# Altium PCB DSP6748_F.PcbDoc (part 10 of 16)
Units mil, origin at the board's own origin, x right, y up, seen from the top; angles counter-clockwise.
Board outline 8188.98 x 4055.12 mil, 4 copper layers (Top Layer, GND, VCC, Bottom Layer); 409 components, 262 nets, 1424 pads, 350 vias.
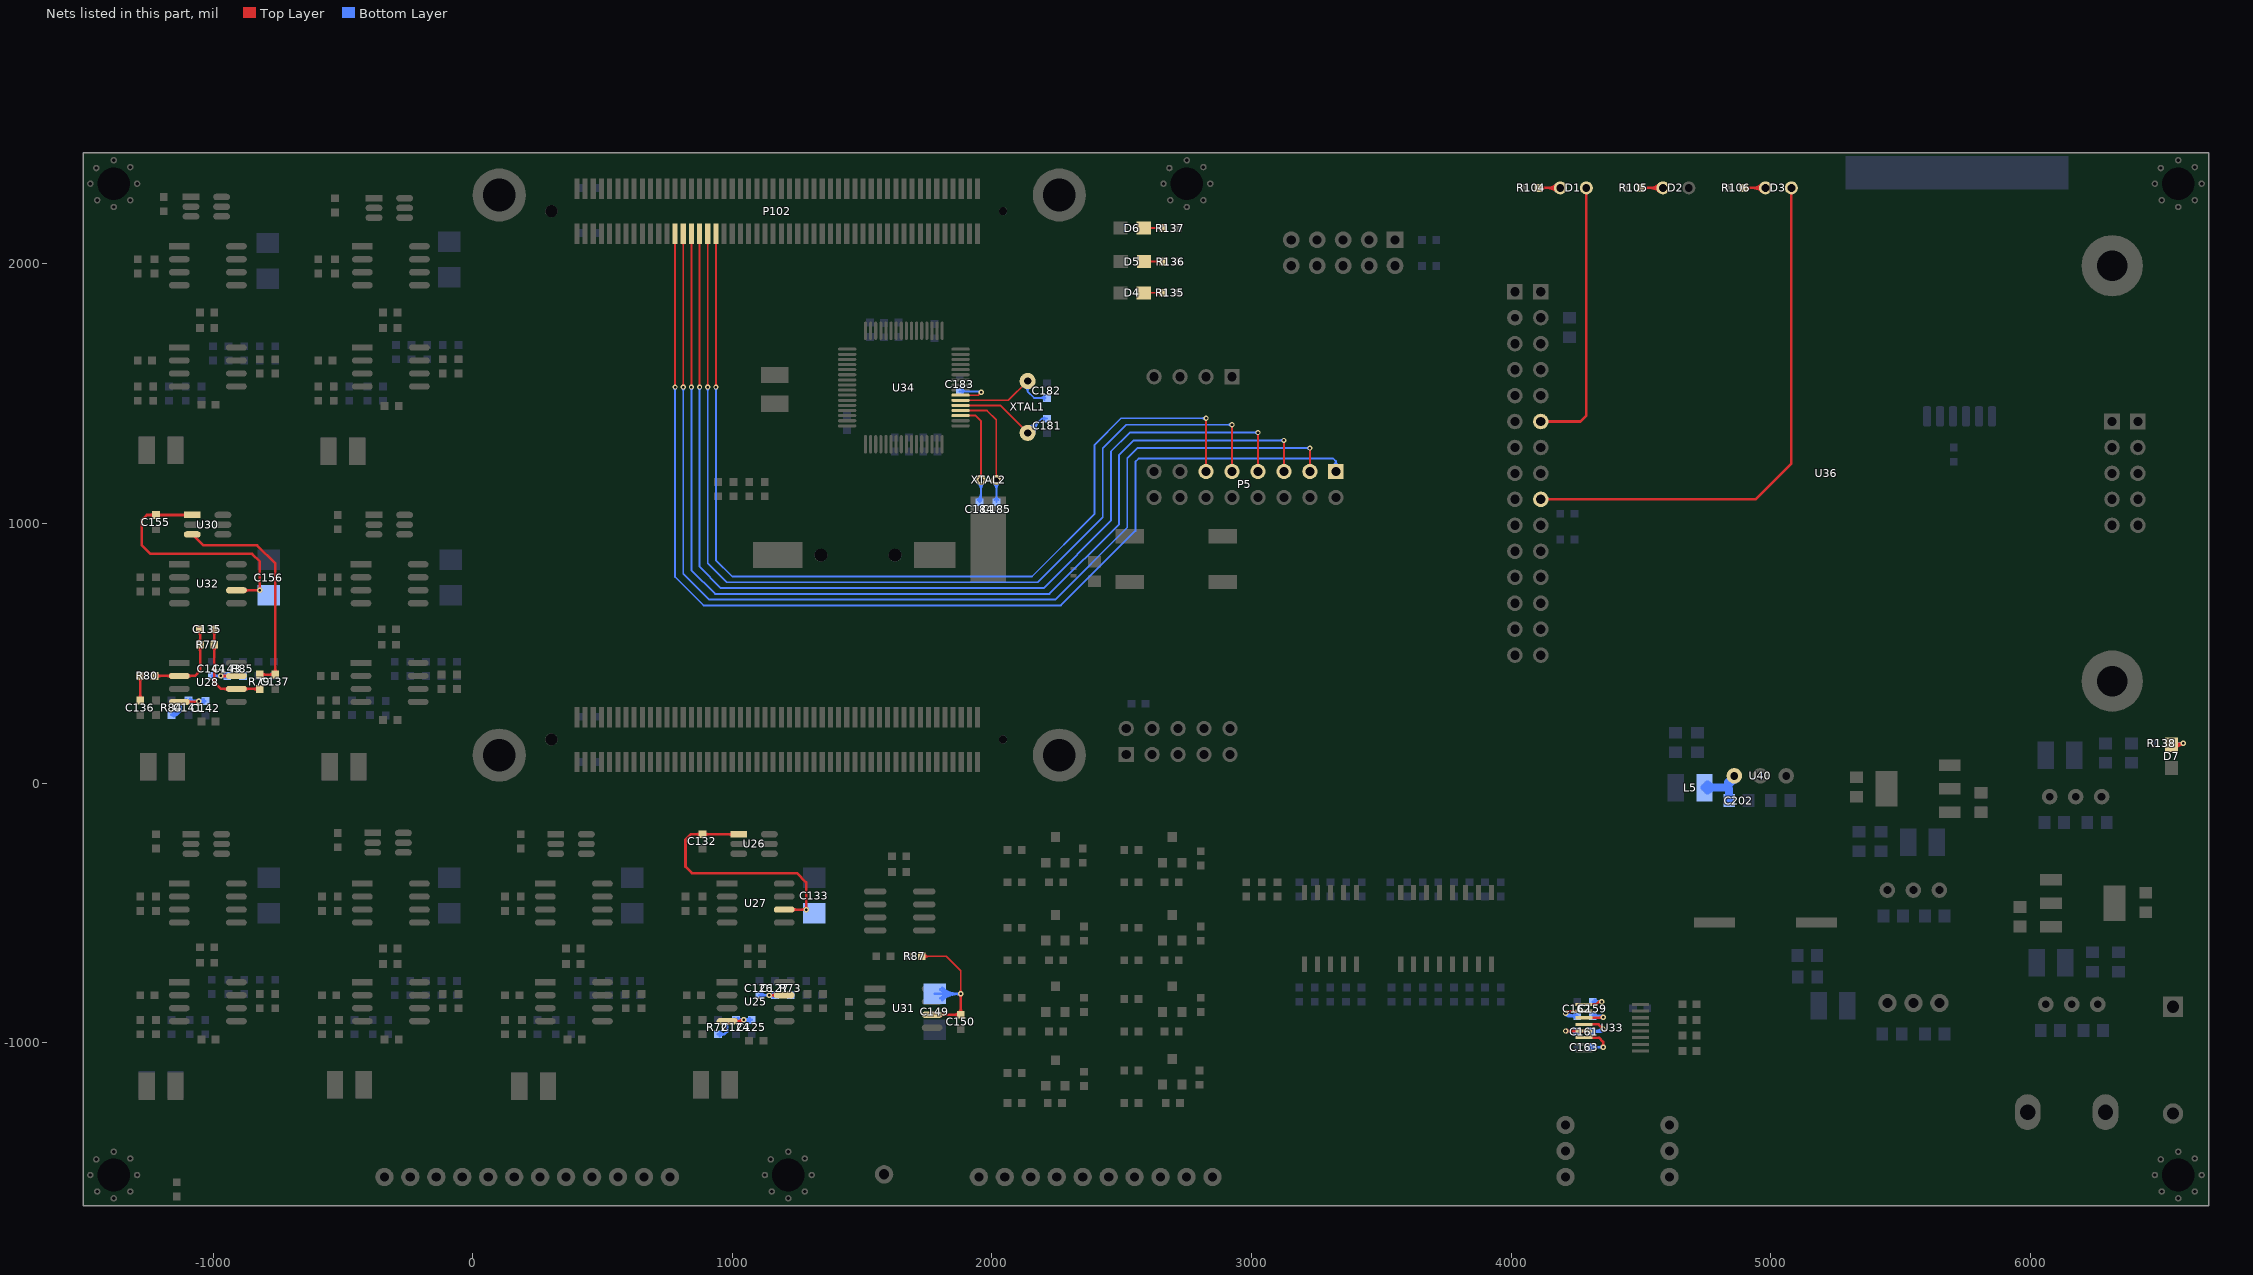
[diagram p12: the nets of this part, all layers, seen from the top]

## Via types
v1: diameter 21, hole 10, Top Layer to Bottom Layer, 244 vias
v2: diameter 20, hole 10, Top Layer to Bottom Layer, 84 vias
v3: diameter 32, hole 16, Top Layer to Bottom Layer, 11 vias
v4: diameter 24, hole 12, Top Layer to Bottom Layer, 7 vias
v5: diameter 39.37, hole 19.68, Top Layer to Bottom Layer, 3 vias
v6: diameter 30, hole 15, Top Layer to Bottom Layer, 1 vias

## Nets (pads, with @x,y where several pads share a name; then routed paths per layer and width w, separated by ;. In a path a pad name is that pad's centre, name@x,y a point inside that pad or via, vN(x,y) a via of type N, cw(c..) or ccw(c..) an arc to the next point about the centre after c; other vN are vias at no path point) (continued)
NetC124_2: C124.2 C125.2 R72.2 U25.4 | length 1117.1
  Top Layer w10: U25.4@979.81,-917.48 1039.81,-917.48 v1(1044.81,-912.48) ; U25.4@1012.76,-922.43 cw(c1024.71,-934.38) 1024.71,-917.48 ; U25.4@1012.76,-922.43 cw(c1024.71,-934.38) 1024.71,-917.48 ; U25.4@1012.76,-922.43 cw(c1024.71,-934.38) 1024.71,-917.48 ; U25.4@1012.76,-912.53 ccw(c1024.71,-900.58) 1024.71,-917.48 ; U25.4@1012.76,-912.53 ccw(c1024.71,-900.58) 1024.71,-917.48 ; U25.4@1012.76,-912.53 ccw(c1024.71,-900.58) 1024.71,-917.48 ; U25.4@1019.46,-917.48 ccw(c1019.46,-887.13) v1@1040.92,-908.59 ; U25.4@1019.46,-917.48 ccw(c1019.46,-887.13) v1@1040.92,-908.59 ; U25.4@1019.46,-917.48 ccw(c1019.46,-887.13) v1@1040.92,-908.59
  Bottom Layer w10: R72.2@944.81,-967.48 969.81,-967.48 979.81,-957.48 979.81,-924.48 991.81,-912.48 ; C125.2@1074.81,-912.48 v1(1044.81,-912.48) C124.2@1014.81,-912.48 991.81,-912.48 ; R72.2@951.88,-974.55 cw(c968.95,-991.62) 968.95,-967.48 ; R72.2@951.88,-974.55 cw(c968.95,-991.62) 968.95,-967.48 ; R72.2@951.88,-974.55 cw(c968.95,-991.62) 968.95,-967.48 ; R72.2@951.88,-960.41 ccw(c968.95,-943.34) 968.95,-967.48 ; R72.2@951.88,-960.41 ccw(c968.95,-943.34) 968.95,-967.48 ; R72.2@951.88,-960.41 ccw(c968.95,-943.34) 968.95,-967.48 ; 991.81,-912.48 cw(c991.81,-933.93) C124.2@1007.5,-919.3 ; 991.81,-912.48 ccw(c991.81,-891.03) C124.2@1007.5,-905.66 ; 991.81,-912.48 cw(c991.81,-933.93) C124.2@1007.5,-919.3 ; 991.81,-912.48 ccw(c991.81,-891.03) C124.2@1007.5,-905.66 ; 991.81,-912.48 ccw(c991.81,-891.03) C124.2@1007.5,-905.66 ; 991.81,-912.48 cw(c991.81,-933.93) C124.2@1007.5,-919.3 ; C124.2@1021.88,-919.55 cw(c1038.95,-936.62) v1@1038.95,-912.48 ; C124.2@1021.88,-919.55 cw(c1038.95,-936.62) v1@1038.95,-912.48 ; C124.2@1021.88,-919.55 cw(c1038.95,-936.62) v1@1038.95,-912.48 ; C124.2@1021.88,-905.41 ccw(c1038.95,-888.34) v1@1038.95,-912.48 ; C124.2@1021.88,-905.41 ccw(c1038.95,-888.34) v1@1038.95,-912.48 ; C124.2@1021.88,-905.41 ccw(c1038.95,-888.34) v1@1038.95,-912.48 ; C124.2@1029.42,-915.03 cw(c1033.35,-929.71) v1@1041.76,-917.06 ; C124.2@1029.42,-915.03 cw(c1033.35,-929.71) v1@1041.76,-917.06 ; C124.2@1029.42,-915.03 cw(c1033.35,-929.71) v1@1041.76,-917.06 ; C124.2@1029.42,-909.93 ccw(c1033.35,-895.25) v1@1041.76,-907.9 ; C124.2@1029.42,-909.93 ccw(c1033.35,-895.25) v1@1041.76,-907.9 ; C124.2@1029.42,-909.93 ccw(c1033.35,-895.25) v1@1041.76,-907.9 ; 1031.53,-912.48 cw(c1031.53,-925.76) v1@1040.92,-916.37 ; 1031.53,-912.48 ccw(c1031.53,-899.2) v1@1040.92,-908.59 ; 1031.53,-912.48 cw(c1031.53,-925.76) v1@1040.92,-916.37 ; 1031.53,-912.48 ccw(c1031.53,-899.2) v1@1040.92,-908.59 ; 1031.53,-912.48 ccw(c1031.53,-899.2) v1@1040.92,-908.59 ; 1031.53,-912.48 cw(c1031.53,-925.76) v1@1040.92,-916.37 ; v1@1047.86,-917.06 cw(c1056.27,-929.71) C125.2@1060.2,-915.03 ; v1@1047.86,-917.06 cw(c1056.27,-929.71) C125.2@1060.2,-915.03 ; v1@1047.86,-917.06 cw(c1056.27,-929.71) C125.2@1060.2,-915.03 ; v1@1047.86,-907.9 ccw(c1056.27,-895.25) C125.2@1060.2,-909.93 ; v1@1047.86,-907.9 ccw(c1056.27,-895.25) C125.2@1060.2,-909.93 ; v1@1047.86,-907.9 ccw(c1056.27,-895.25) C125.2@1060.2,-909.93 ; v1@1048.7,-916.37 cw(c1058.09,-925.76) 1058.09,-912.48 ; v1@1048.7,-916.37 cw(c1058.09,-925.76) 1058.09,-912.48 ; v1@1048.7,-916.37 cw(c1058.09,-925.76) 1058.09,-912.48 ; v1@1048.7,-908.59 ccw(c1058.09,-899.2) 1058.09,-912.48 ; v1@1048.7,-908.59 ccw(c1058.09,-899.2) 1058.09,-912.48 ; v1@1048.7,-908.59 ccw(c1058.09,-899.2) 1058.09,-912.48 ; v1@1050.67,-912.48 cw(c1050.67,-936.62) C125.2@1067.74,-919.55 ; v1@1050.67,-912.48 ccw(c1050.67,-888.34) C125.2@1067.74,-905.41 ; v1@1050.67,-912.48 cw(c1050.67,-936.62) C125.2@1067.74,-919.55 ; v1@1050.67,-912.48 ccw(c1050.67,-888.34) C125.2@1067.74,-905.41 ; v1@1050.67,-912.48 ccw(c1050.67,-888.34) C125.2@1067.74,-905.41 ; v1@1050.67,-912.48 cw(c1050.67,-936.62) C125.2@1067.74,-919.55
NetC126_2: C126.2 C127.2 R73.1 U25.7 | length 855.7
  Top Layer w10: v1@1144.81,-817.48 U25.7@1199.81,-817.48 ; v1@1146.7,-821.37 cw(c1156.09,-830.76) 1156.09,-817.48 ; v1@1146.7,-821.37 cw(c1156.09,-830.76) 1156.09,-817.48 ; v1@1146.7,-821.37 cw(c1156.09,-830.76) 1156.09,-817.48 ; v1@1146.7,-813.59 ccw(c1156.09,-804.2) 1156.09,-817.48 ; v1@1146.7,-813.59 ccw(c1156.09,-804.2) 1156.09,-817.48 ; v1@1146.7,-813.59 ccw(c1156.09,-804.2) 1156.09,-817.48 ; 1154.91,-817.48 cw(c1154.91,-834.38) U25.7@1166.86,-822.43 ; 1154.91,-817.48 ccw(c1154.91,-800.58) U25.7@1166.86,-812.53 ; 1154.91,-817.48 cw(c1154.91,-834.38) U25.7@1166.86,-822.43 ; 1154.91,-817.48 ccw(c1154.91,-800.58) U25.7@1166.86,-812.53 ; 1154.91,-817.48 ccw(c1154.91,-800.58) U25.7@1166.86,-812.53 ; 1154.91,-817.48 cw(c1154.91,-834.38) U25.7@1166.86,-822.43
  Bottom Layer w10: C126.2@1104.81,-817.48 C127.2@1164.81,-817.48 R73.1@1224.81,-817.48 ; v1@1146.7,-821.37 cw(c1156.09,-830.76) 1156.09,-817.48 cw(c1156.09,-804.2) v1@1146.7,-813.59 ; C126.2@1111.88,-824.55 cw(c1128.95,-841.62) 1128.95,-817.48 ; C126.2@1111.88,-824.55 cw(c1128.95,-841.62) 1128.95,-817.48 ; C126.2@1111.88,-824.55 cw(c1128.95,-841.62) 1128.95,-817.48 ; C126.2@1111.88,-810.41 ccw(c1128.95,-793.34) 1128.95,-817.48 ; C126.2@1111.88,-810.41 ccw(c1128.95,-793.34) 1128.95,-817.48 ; C126.2@1111.88,-810.41 ccw(c1128.95,-793.34) 1128.95,-817.48 ; 1129.53,-817.48 cw(c1129.53,-830.76) v1@1138.92,-821.37 ; 1129.53,-817.48 ccw(c1129.53,-804.2) v1@1138.92,-813.59 ; 1129.53,-817.48 cw(c1129.53,-830.76) v1@1138.92,-821.37 ; 1129.53,-817.48 ccw(c1129.53,-804.2) v1@1138.92,-813.59 ; 1129.53,-817.48 ccw(c1129.53,-804.2) v1@1138.92,-813.59 ; 1129.53,-817.48 cw(c1129.53,-830.76) v1@1138.92,-821.37 ; v1@1140.67,-817.48 cw(c1140.67,-841.62) C127.2@1157.74,-824.55 ; v1@1140.67,-817.48 ccw(c1140.67,-793.34) C127.2@1157.74,-810.41 ; v1@1140.67,-817.48 cw(c1140.67,-841.62) C127.2@1157.74,-824.55 ; v1@1140.67,-817.48 ccw(c1140.67,-793.34) C127.2@1157.74,-810.41 ; v1@1140.67,-817.48 ccw(c1140.67,-793.34) C127.2@1157.74,-810.41 ; v1@1140.67,-817.48 cw(c1140.67,-841.62) C127.2@1157.74,-824.55 ; C127.2@1171.88,-824.55 cw(c1188.95,-841.62) 1188.95,-817.48 ; C127.2@1171.88,-824.55 cw(c1188.95,-841.62) 1188.95,-817.48 ; C127.2@1171.88,-824.55 cw(c1188.95,-841.62) 1188.95,-817.48 ; C127.2@1171.88,-810.41 ccw(c1188.95,-793.34) 1188.95,-817.48 ; C127.2@1171.88,-810.41 ccw(c1188.95,-793.34) 1188.95,-817.48 ; C127.2@1171.88,-810.41 ccw(c1188.95,-793.34) 1188.95,-817.48 ; 1200.67,-817.48 cw(c1200.67,-841.62) R73.1@1217.74,-824.55 ; 1200.67,-817.48 ccw(c1200.67,-793.34) R73.1@1217.74,-810.41 ; 1200.67,-817.48 cw(c1200.67,-841.62) R73.1@1217.74,-824.55 ; 1200.67,-817.48 ccw(c1200.67,-793.34) R73.1@1217.74,-810.41 ; 1200.67,-817.48 ccw(c1200.67,-793.34) R73.1@1217.74,-810.41 ; 1200.67,-817.48 cw(c1200.67,-841.62) R73.1@1217.74,-824.55
  other v1: 1142.81,-817.48
NetC132_2: C132.2 C133.1 U26.1 U27.6 | length 1515.8
  Top Layer w10: U26.1@1024.81,-197.48 C132.2@884.81,-197.48 839.81,-197.48 819.81,-217.48 819.81,-322.48 844.81,-347.48 1249.81,-347.48 1284.81,-382.48 v1(1284.81,-487.48) U27.6@1199.81,-487.48 ; 860.67,-197.48 cw(c860.67,-221.62) C132.2@877.74,-204.55 ; 860.67,-197.48 ccw(c860.67,-173.34) C132.2@877.74,-190.41 ; 860.67,-197.48 cw(c860.67,-221.62) C132.2@877.74,-204.55 ; 860.67,-197.48 ccw(c860.67,-173.34) C132.2@877.74,-190.41 ; 860.67,-197.48 ccw(c860.67,-173.34) C132.2@877.74,-190.41 ; 860.67,-197.48 cw(c860.67,-221.62) C132.2@877.74,-204.55 ; C132.2@891.88,-204.55 cw(c908.95,-221.62) 908.95,-197.48 ; C132.2@891.88,-204.55 cw(c908.95,-221.62) 908.95,-197.48 ; C132.2@891.88,-204.55 cw(c908.95,-221.62) 908.95,-197.48 ; C132.2@891.88,-190.41 ccw(c908.95,-173.34) 908.95,-197.48 ; C132.2@891.88,-190.41 ccw(c908.95,-173.34) 908.95,-197.48 ; C132.2@891.88,-190.41 ccw(c908.95,-173.34) 908.95,-197.48 ; 986.7,-197.48 cw(c986.7,-215.59) U26.1@999.51,-202.78 ; 986.7,-197.48 ccw(c986.7,-179.37) U26.1@999.51,-192.18 ; 986.7,-197.48 cw(c986.7,-215.59) U26.1@999.51,-202.78 ; 986.7,-197.48 ccw(c986.7,-179.37) U26.1@999.51,-192.18 ; 986.7,-197.48 ccw(c986.7,-179.37) U26.1@999.51,-192.18 ; 986.7,-197.48 cw(c986.7,-215.59) U26.1@999.51,-202.78 ; U27.6@1232.76,-492.43 cw(c1244.71,-504.38) 1244.71,-487.48 ; U27.6@1232.76,-492.43 cw(c1244.71,-504.38) 1244.71,-487.48 ; U27.6@1232.76,-492.43 cw(c1244.71,-504.38) 1244.71,-487.48 ; U27.6@1232.76,-482.53 ccw(c1244.71,-470.58) 1244.71,-487.48 ; U27.6@1232.76,-482.53 ccw(c1244.71,-470.58) 1244.71,-487.48 ; U27.6@1232.76,-482.53 ccw(c1244.71,-470.58) 1244.71,-487.48 ; 1271.53,-487.48 cw(c1271.53,-500.76) v1@1280.92,-491.37 ; 1271.53,-487.48 ccw(c1271.53,-474.2) v1@1280.92,-483.59 ; 1271.53,-487.48 cw(c1271.53,-500.76) v1@1280.92,-491.37 ; 1271.53,-487.48 ccw(c1271.53,-474.2) v1@1280.92,-483.59 ; 1271.53,-487.48 ccw(c1271.53,-474.2) v1@1280.92,-483.59 ; 1271.53,-487.48 cw(c1271.53,-500.76) v1@1280.92,-491.37 ; v1@1280.92,-483.59 ccw(c1271.53,-474.2) 1284.81,-474.2 ; v1@1280.92,-483.59 ccw(c1271.53,-474.2) 1284.81,-474.2 ; v1@1280.92,-483.59 ccw(c1271.53,-474.2) 1284.81,-474.2 ; 1284.81,-474.2 ccw(c1298.09,-474.2) v1@1288.7,-483.59 ; 1284.81,-474.2 ccw(c1298.09,-474.2) v1@1288.7,-483.59 ; 1284.81,-474.2 ccw(c1298.09,-474.2) v1@1288.7,-483.59
NetC135_1: C135.1 R77.2 R79.1 U28.6 | length 1014.7
  Top Layer w10: R77.2@-995.19,532.52 C135.1@-995.19,597.52 ; R77.2@-995.19,537.52 -995.19,387.52 -970.19,362.52 U28.6@-910.19,362.52 R79.1@-820.19,362.52 ; R77.2@-1002.26,525.45 cw(c-1019.33,508.38) -995.19,508.38 ; R77.2@-1002.26,525.45 cw(c-1019.33,508.38) -995.19,508.38 ; R77.2@-1002.26,525.45 cw(c-1019.33,508.38) -995.19,508.38 ; R77.2@-1002.26,539.59 ccw(c-1019.33,556.66) -995.19,556.66 ; R77.2@-1002.26,539.59 ccw(c-1019.33,556.66) -995.19,556.66 ; R77.2@-1002.26,539.59 ccw(c-1019.33,556.66) -995.19,556.66 ; C135.1@-1002.26,585.45 cw(c-1019.33,568.38) -995.19,568.38 ; C135.1@-1002.26,585.45 cw(c-1019.33,568.38) -995.19,568.38 ; C135.1@-1002.26,585.45 cw(c-1019.33,568.38) -995.19,568.38 ; -995.19,508.38 cw(c-971.05,508.38) R77.2@-988.12,525.45 ; -995.19,508.38 cw(c-971.05,508.38) R77.2@-988.12,525.45 ; -995.19,508.38 cw(c-971.05,508.38) R77.2@-988.12,525.45 ; -995.19,556.66 ccw(c-971.05,556.66) R77.2@-988.12,539.59 ; -995.19,556.66 ccw(c-971.05,556.66) R77.2@-988.12,539.59 ; -995.19,556.66 ccw(c-971.05,556.66) R77.2@-988.12,539.59 ; -995.19,568.38 cw(c-971.05,568.38) C135.1@-988.12,585.45 ; -995.19,568.38 cw(c-971.05,568.38) C135.1@-988.12,585.45 ; -995.19,568.38 cw(c-971.05,568.38) C135.1@-988.12,585.45 ; -955.09,362.52 cw(c-955.09,345.62) U28.6@-943.14,357.57 ; -955.09,362.52 ccw(c-955.09,379.42) U28.6@-943.14,367.47 ; -955.09,362.52 cw(c-955.09,345.62) U28.6@-943.14,357.57 ; -955.09,362.52 ccw(c-955.09,379.42) U28.6@-943.14,367.47 ; -955.09,362.52 ccw(c-955.09,379.42) U28.6@-943.14,367.47 ; -955.09,362.52 cw(c-955.09,345.62) U28.6@-943.14,357.57 ; U28.6@-877.24,357.57 cw(c-865.29,345.62) -865.29,362.52 ; U28.6@-877.24,357.57 cw(c-865.29,345.62) -865.29,362.52 ; U28.6@-877.24,357.57 cw(c-865.29,345.62) -865.29,362.52 ; U28.6@-877.24,367.47 ccw(c-865.29,379.42) -865.29,362.52 ; U28.6@-877.24,367.47 ccw(c-865.29,379.42) -865.29,362.52 ; U28.6@-877.24,367.47 ccw(c-865.29,379.42) -865.29,362.52 ; -844.33,362.52 cw(c-844.33,338.38) R79.1@-827.26,355.45 ; -844.33,362.52 ccw(c-844.33,386.66) R79.1@-827.26,369.59 ; -844.33,362.52 cw(c-844.33,338.38) R79.1@-827.26,355.45 ; -844.33,362.52 ccw(c-844.33,386.66) R79.1@-827.26,369.59 ; -844.33,362.52 ccw(c-844.33,386.66) R79.1@-827.26,369.59 ; -844.33,362.52 cw(c-844.33,338.38) R79.1@-827.26,355.45
NetC135_2: C135.2 R77.1 R80.2 U28.2 | length 967.6
  Top Layer w10: R80.2@-1225.19,412.52 U28.2@-1130.19,412.52 -1070.19,412.52 -1050.19,432.52 R77.1@-1050.19,537.52 ; R77.1@-1050.19,532.52 C135.2@-1050.19,597.52 ; R80.2@-1218.12,405.45 cw(c-1201.05,388.38) -1201.05,412.52 ; R80.2@-1218.12,405.45 cw(c-1201.05,388.38) -1201.05,412.52 ; R80.2@-1218.12,405.45 cw(c-1201.05,388.38) -1201.05,412.52 ; R80.2@-1218.12,419.59 ccw(c-1201.05,436.66) -1201.05,412.52 ; R80.2@-1218.12,419.59 ccw(c-1201.05,436.66) -1201.05,412.52 ; R80.2@-1218.12,419.59 ccw(c-1201.05,436.66) -1201.05,412.52 ; -1175.09,412.52 cw(c-1175.09,395.62) U28.2@-1163.14,407.57 ; -1175.09,412.52 ccw(c-1175.09,429.42) U28.2@-1163.14,417.47 ; -1175.09,412.52 cw(c-1175.09,395.62) U28.2@-1163.14,407.57 ; -1175.09,412.52 ccw(c-1175.09,429.42) U28.2@-1163.14,417.47 ; -1175.09,412.52 ccw(c-1175.09,429.42) U28.2@-1163.14,417.47 ; -1175.09,412.52 cw(c-1175.09,395.62) U28.2@-1163.14,407.57 ; U28.2@-1097.24,407.57 cw(c-1085.29,395.62) -1085.29,412.52 ; U28.2@-1097.24,407.57 cw(c-1085.29,395.62) -1085.29,412.52 ; U28.2@-1097.24,407.57 cw(c-1085.29,395.62) -1085.29,412.52 ; U28.2@-1097.24,417.47 ccw(c-1085.29,429.42) -1085.29,412.52 ; U28.2@-1097.24,417.47 ccw(c-1085.29,429.42) -1085.29,412.52 ; U28.2@-1097.24,417.47 ccw(c-1085.29,429.42) -1085.29,412.52 ; R77.1@-1057.26,525.45 cw(c-1074.33,508.38) -1050.19,508.38 ; R77.1@-1057.26,525.45 cw(c-1074.33,508.38) -1050.19,508.38 ; R77.1@-1057.26,525.45 cw(c-1074.33,508.38) -1050.19,508.38 ; R77.1@-1057.26,539.59 ccw(c-1074.33,556.66) -1050.19,556.66 ; R77.1@-1057.26,539.59 ccw(c-1074.33,556.66) -1050.19,556.66 ; R77.1@-1057.26,539.59 ccw(c-1074.33,556.66) -1050.19,556.66 ; C135.2@-1057.26,585.45 cw(c-1074.33,568.38) -1050.19,568.38 ; C135.2@-1057.26,585.45 cw(c-1074.33,568.38) -1050.19,568.38 ; C135.2@-1057.26,585.45 cw(c-1074.33,568.38) -1050.19,568.38 ; -1050.19,508.38 cw(c-1026.05,508.38) R77.1@-1043.12,525.45 ; -1050.19,508.38 cw(c-1026.05,508.38) R77.1@-1043.12,525.45 ; -1050.19,508.38 cw(c-1026.05,508.38) R77.1@-1043.12,525.45 ; -1050.19,556.66 ccw(c-1026.05,556.66) R77.1@-1043.12,539.59 ; -1050.19,556.66 ccw(c-1026.05,556.66) R77.1@-1043.12,539.59 ; -1050.19,556.66 ccw(c-1026.05,556.66) R77.1@-1043.12,539.59 ; -1050.19,568.38 cw(c-1026.05,568.38) C135.2@-1043.12,585.45 ; -1050.19,568.38 cw(c-1026.05,568.38) C135.2@-1043.12,585.45 ; -1050.19,568.38 cw(c-1026.05,568.38) C135.2@-1043.12,585.45
NetC136_2: C136.2 R80.1 | length 322.5
  Top Layer w10: C136.2@-1280.19,317.52 R80.1@-1280.19,412.52 ; C136.2@-1287.26,324.59 ccw(c-1304.33,341.66) -1280.19,341.66 ; C136.2@-1287.26,324.59 ccw(c-1304.33,341.66) -1280.19,341.66 ; C136.2@-1287.26,324.59 ccw(c-1304.33,341.66) -1280.19,341.66 ; R80.1@-1287.26,405.45 cw(c-1304.33,388.38) -1280.19,388.38 ; R80.1@-1287.26,405.45 cw(c-1304.33,388.38) -1280.19,388.38 ; R80.1@-1287.26,405.45 cw(c-1304.33,388.38) -1280.19,388.38 ; -1280.19,341.66 ccw(c-1256.05,341.66) C136.2@-1273.12,324.59 ; -1280.19,341.66 ccw(c-1256.05,341.66) C136.2@-1273.12,324.59 ; -1280.19,341.66 ccw(c-1256.05,341.66) C136.2@-1273.12,324.59 ; -1280.19,388.38 cw(c-1256.05,388.38) R80.1@-1273.12,405.45 ; -1280.19,388.38 cw(c-1256.05,388.38) R80.1@-1273.12,405.45 ; -1280.19,388.38 cw(c-1256.05,388.38) R80.1@-1273.12,405.45
NetC137_2: C137.2 R79.2 U30.3 | length 1195.6
  Top Layer w10: U30.3@-1080.19,957.72 -1037.79,915.31 -830.35,915.31 -760.19,845.16 C137.2@-760.19,417.52 R79.2@-820.19,417.52 ; R79.2@-813.12,410.45 cw(c-796.05,393.38) -796.05,417.52 ; R79.2@-813.12,410.45 cw(c-796.05,393.38) -796.05,417.52 ; R79.2@-813.12,410.45 cw(c-796.05,393.38) -796.05,417.52 ; R79.2@-813.12,424.59 ccw(c-796.05,441.66) -796.05,417.52 ; R79.2@-813.12,424.59 ccw(c-796.05,441.66) -796.05,417.52 ; R79.2@-813.12,424.59 ccw(c-796.05,441.66) -796.05,417.52 ; -784.33,417.52 cw(c-784.33,393.38) C137.2@-767.26,410.45 ; -784.33,417.52 ccw(c-784.33,441.66) C137.2@-767.26,424.59 ; -784.33,417.52 cw(c-784.33,393.38) C137.2@-767.26,410.45 ; -784.33,417.52 ccw(c-784.33,441.66) C137.2@-767.26,424.59 ; -784.33,417.52 ccw(c-784.33,441.66) C137.2@-767.26,424.59 ; -784.33,417.52 cw(c-784.33,393.38) C137.2@-767.26,410.45 ; C137.2@-767.26,424.59 ccw(c-784.33,441.66) -760.19,441.66 ; C137.2@-767.26,424.59 ccw(c-784.33,441.66) -760.19,441.66 ; C137.2@-767.26,424.59 ccw(c-784.33,441.66) -760.19,441.66 ; -760.19,441.66 ccw(c-736.05,441.66) C137.2@-753.12,424.59 ; -760.19,441.66 ccw(c-736.05,441.66) C137.2@-753.12,424.59 ; -760.19,441.66 ccw(c-736.05,441.66) C137.2@-753.12,424.59
NetC141_2: C141.2 C142.2 R84.2 U28.4 | length 1140.1
  Top Layer w10: U28.4@-1130.19,312.52 -1058.19,312.52 v1(-1055.19,315.52) ; U28.4@-1097.24,307.57 cw(c-1085.29,295.62) -1085.29,312.52 ; U28.4@-1097.24,307.57 cw(c-1085.29,295.62) -1085.29,312.52 ; U28.4@-1097.24,307.57 cw(c-1085.29,295.62) -1085.29,312.52 ; U28.4@-1097.24,317.47 ccw(c-1085.29,329.42) -1085.29,312.52 ; U28.4@-1097.24,317.47 ccw(c-1085.29,329.42) -1085.29,312.52 ; U28.4@-1097.24,317.47 ccw(c-1085.29,329.42) -1085.29,312.52 ; -1075.71,312.52 ccw(c-1075.71,336.04) v1@-1059.08,319.41 ; -1075.71,312.52 ccw(c-1075.71,336.04) v1@-1059.08,319.41 ; -1075.71,312.52 ccw(c-1075.71,336.04) v1@-1059.08,319.41
  Bottom Layer w10: R84.2@-1156.18,271.68 ccw(c-1144.96,297.29) -1125.19,277.52 ; -1135.55,267.16 cw(c-1151.27,282.89) R84.2@-1160.19,262.52 -1140.19,262.52 ; -1115.95,314.76 cw(c-1103.77,302.58) C141.2@-1095.19,317.52 ; C141.2@-1100.17,308.85 ccw(c-1110.51,290.84) -1125.19,305.52 ; v1@-1051.3,311.63 cw(c-1041.91,302.24) -1041.91,315.52 cw(c-1041.91,328.8) v1@-1051.3,319.41 ; C142.2@-1030.19,315.52 v1(-1055.19,315.52) -1115.19,315.52 ; R84.2@-1152.19,256.52 cw(c-1140.19,247.52) -1140.19,262.52 ; R84.2@-1152.19,256.52 cw(c-1140.19,247.52) -1140.19,262.52 ; R84.2@-1152.19,256.52 cw(c-1140.19,247.52) -1140.19,262.52 ; R84.2@-1152.19,268.52 ccw(c-1140.19,277.52) -1140.19,262.52 ; R84.2@-1152.19,268.52 ccw(c-1140.19,277.52) -1140.19,262.52 ; R84.2@-1152.19,268.52 ccw(c-1140.19,277.52) -1140.19,262.52 ; -1140.19,262.52 -1125.19,277.52 ; -1125.19,277.52 -1125.19,305.52 ; -1125.19,305.52 -1115.19,315.52 ; -1115.19,315.52 ccw(c-1115.19,328.19) C141.2@-1104.01,322.23 ; -1115.19,315.52 ccw(c-1115.19,328.19) C141.2@-1104.01,322.23 ; -1115.19,315.52 ccw(c-1115.19,328.19) C141.2@-1104.01,322.23 ; -1114.5,315.52 cw(c-1114.5,298.21) C141.2@-1102.26,310.45 ; -1114.5,315.52 cw(c-1114.5,298.21) C141.2@-1102.26,310.45 ; -1114.5,315.52 cw(c-1114.5,298.21) C141.2@-1102.26,310.45 ; C141.2@-1095.19,317.52 ccw(c-1100.81,289.54) -1120.99,309.72 cw(c-1100.81,289.54) C141.2@-1095.19,317.52 ; C141.2@-1088.12,310.45 cw(c-1075.88,298.21) -1075.88,315.52 ; C141.2@-1088.12,310.45 cw(c-1075.88,298.21) -1075.88,315.52 ; C141.2@-1088.12,310.45 cw(c-1075.88,298.21) -1075.88,315.52 ; C141.2@-1088.12,324.59 ccw(c-1066.22,346.49) -1066.22,315.52 ; C141.2@-1088.12,324.59 ccw(c-1066.22,346.49) -1066.22,315.52 ; C141.2@-1088.12,324.59 ccw(c-1066.22,346.49) -1066.22,315.52 ; -1068.47,315.52 cw(c-1068.47,302.24) v1@-1059.08,311.63 ; -1068.47,315.52 ccw(c-1068.47,328.8) v1@-1059.08,319.41 ; -1068.47,315.52 cw(c-1068.47,302.24) v1@-1059.08,311.63 ; -1068.47,315.52 ccw(c-1068.47,328.8) v1@-1059.08,319.41 ; -1068.47,315.52 ccw(c-1068.47,328.8) v1@-1059.08,319.41 ; -1068.47,315.52 cw(c-1068.47,302.24) v1@-1059.08,311.63 ; v1@-1053.33,315.52 cw(c-1053.33,291.38) C142.2@-1036.26,308.45 ; v1@-1053.33,315.52 ccw(c-1053.33,339.66) C142.2@-1036.26,322.59 ; v1@-1053.33,315.52 cw(c-1053.33,291.38) C142.2@-1036.26,308.45 ; v1@-1053.33,315.52 ccw(c-1053.33,339.66) C142.2@-1036.26,322.59 ; v1@-1053.33,315.52 ccw(c-1053.33,339.66) C142.2@-1036.26,322.59 ; v1@-1053.33,315.52 cw(c-1053.33,291.38) C142.2@-1036.26,308.45 ; v1@-1052.2,310.9 cw(c-1045.34,300.3) C142.2@-1042.07,312.5 ; v1@-1052.2,310.9 cw(c-1045.34,300.3) C142.2@-1042.07,312.5 ; v1@-1052.2,310.9 cw(c-1045.34,300.3) C142.2@-1042.07,312.5 ; v1@-1052.2,320.14 ccw(c-1045.34,330.74) C142.2@-1042.07,318.54 ; v1@-1052.2,320.14 ccw(c-1045.34,330.74) C142.2@-1042.07,318.54 ; v1@-1052.2,320.14 ccw(c-1045.34,330.74) C142.2@-1042.07,318.54 ; v1@-1050.43,312.77 cw(c-1040.35,306.95) C142.2@-1043.36,318.19 ; v1@-1050.43,312.77 cw(c-1040.35,306.95) C142.2@-1043.36,318.19 ; v1@-1050.43,312.77 cw(c-1040.35,306.95) C142.2@-1043.36,318.19 ; v1@-1050.43,318.27 ccw(c-1040.35,324.09) C142.2@-1043.36,312.85 ; v1@-1050.43,318.27 ccw(c-1040.35,324.09) C142.2@-1043.36,312.85 ; v1@-1050.43,318.27 ccw(c-1040.35,324.09) C142.2@-1043.36,312.85
NetC143_2: C143.2 C144.2 R85.1 U28.7 | length 979.6
  Top Layer w10: v1(-970.19,412.52) U28.7@-910.19,412.52 ; v1@-966.3,408.63 cw(c-956.91,399.24) -956.91,412.52 ; v1@-966.3,408.63 cw(c-956.91,399.24) -956.91,412.52 ; v1@-966.3,408.63 cw(c-956.91,399.24) -956.91,412.52 ; v1@-966.3,416.41 ccw(c-956.91,425.8) -956.91,412.52 ; v1@-966.3,416.41 ccw(c-956.91,425.8) -956.91,412.52 ; v1@-966.3,416.41 ccw(c-956.91,425.8) -956.91,412.52 ; -955.09,412.52 cw(c-955.09,395.62) U28.7@-943.14,407.57 ; -955.09,412.52 ccw(c-955.09,429.42) U28.7@-943.14,417.47 ; -955.09,412.52 cw(c-955.09,395.62) U28.7@-943.14,407.57 ; -955.09,412.52 ccw(c-955.09,429.42) U28.7@-943.14,417.47 ; -955.09,412.52 ccw(c-955.09,429.42) U28.7@-943.14,417.47 ; -955.09,412.52 cw(c-955.09,395.62) U28.7@-943.14,407.57
  Bottom Layer w10: C144.2@-1005.19,412.52 C143.2@-945.19,412.52 R85.1@-885.19,412.52 ; v1@-966.3,408.63 cw(c-956.91,399.24) -956.91,412.52 cw(c-956.91,425.8) v1@-966.3,416.41 ; C144.2@-998.12,405.45 cw(c-981.05,388.38) -981.05,412.52 ; C144.2@-998.12,405.45 cw(c-981.05,388.38) -981.05,412.52 ; C144.2@-998.12,405.45 cw(c-981.05,388.38) -981.05,412.52 ; C144.2@-998.12,419.59 ccw(c-981.05,436.66) -981.05,412.52 ; C144.2@-998.12,419.59 ccw(c-981.05,436.66) -981.05,412.52 ; C144.2@-998.12,419.59 ccw(c-981.05,436.66) -981.05,412.52 ; -983.47,412.52 cw(c-983.47,399.24) v1@-974.08,408.63 ; -983.47,412.52 ccw(c-983.47,425.8) v1@-974.08,416.41 ; -983.47,412.52 cw(c-983.47,399.24) v1@-974.08,408.63 ; -983.47,412.52 ccw(c-983.47,425.8) v1@-974.08,416.41 ; -983.47,412.52 ccw(c-983.47,425.8) v1@-974.08,416.41 ; -983.47,412.52 cw(c-983.47,399.24) v1@-974.08,408.63 ; v1@-969.33,412.52 cw(c-969.33,388.38) C143.2@-952.26,405.45 ; v1@-969.33,412.52 ccw(c-969.33,436.66) C143.2@-952.26,419.59 ; v1@-969.33,412.52 cw(c-969.33,388.38) C143.2@-952.26,405.45 ; v1@-969.33,412.52 ccw(c-969.33,436.66) C143.2@-952.26,419.59 ; v1@-969.33,412.52 ccw(c-969.33,436.66) C143.2@-952.26,419.59 ; v1@-969.33,412.52 cw(c-969.33,388.38) C143.2@-952.26,405.45 ; v1@-967.22,407.89 cw(c-960.74,397.8) C143.2@-957.63,409.38 ; v1@-967.22,407.89 cw(c-960.74,397.8) C143.2@-957.63,409.38 ; v1@-967.22,407.89 cw(c-960.74,397.8) C143.2@-957.63,409.38 ; v1@-967.22,417.15 ccw(c-960.74,427.24) C143.2@-957.63,415.65 ; v1@-967.22,417.15 ccw(c-960.74,427.24) C143.2@-957.63,415.65 ; v1@-967.22,417.15 ccw(c-960.74,427.24) C143.2@-957.63,415.65 ; v1@-965.43,409.77 cw(c-954.58,403.51) C143.2@-957.82,415.6 ; v1@-965.43,409.77 cw(c-954.58,403.51) C143.2@-957.82,415.6 ; v1@-965.43,409.77 cw(c-954.58,403.51) C143.2@-957.82,415.6 ; v1@-965.43,415.27 ccw(c-954.58,421.53) C143.2@-957.82,409.44 ; v1@-965.43,415.27 ccw(c-954.58,421.53) C143.2@-957.82,409.44 ; v1@-965.43,415.27 ccw(c-954.58,421.53) C143.2@-957.82,409.44 ; C143.2@-938.12,405.45 cw(c-921.05,388.38) -921.05,412.52 ; C143.2@-938.12,405.45 cw(c-921.05,388.38) -921.05,412.52 ; C143.2@-938.12,405.45 cw(c-921.05,388.38) -921.05,412.52 ; C143.2@-938.12,419.59 ccw(c-921.05,436.66) -921.05,412.52 ; C143.2@-938.12,419.59 ccw(c-921.05,436.66) -921.05,412.52 ; C143.2@-938.12,419.59 ccw(c-921.05,436.66) -921.05,412.52 ; -909.33,412.52 cw(c-909.33,388.38) R85.1@-892.26,405.45 ; -909.33,412.52 ccw(c-909.33,436.66) R85.1@-892.26,419.59 ; -909.33,412.52 cw(c-909.33,388.38) R85.1@-892.26,405.45 ; -909.33,412.52 ccw(c-909.33,436.66) R85.1@-892.26,419.59 ; -909.33,412.52 ccw(c-909.33,436.66) R85.1@-892.26,419.59 ; -909.33,412.52 cw(c-909.33,388.38) R85.1@-892.26,405.45
NetC149_1: C149.1 C150.2 R87.2 U31.6 | length 1641.1
  Top Layer w7: R87.2@1729.81,-667.48 1824.81,-667.48 1879.81,-722.48 v1(1879.81,-812.48) ; R87.2@1737.94,-675.61 cw(c1757.57,-695.24) 1757.57,-667.48 ; R87.2@1737.94,-675.61 cw(c1757.57,-695.24) 1757.57,-667.48 ; R87.2@1737.94,-675.61 cw(c1757.57,-695.24) 1757.57,-667.48 ; R87.2@1737.94,-659.35 ccw(c1757.57,-639.72) 1757.57,-667.48 ; R87.2@1737.94,-659.35 ccw(c1757.57,-639.72) 1757.57,-667.48 ; R87.2@1737.94,-659.35 ccw(c1757.57,-639.72) 1757.57,-667.48 ; v1@1874.86,-807.53 ccw(c1862.91,-795.58) 1879.81,-795.58 ; v1@1874.86,-807.53 ccw(c1862.91,-795.58) 1879.81,-795.58 ; v1@1874.86,-807.53 ccw(c1862.91,-795.58) 1879.81,-795.58 ; 1879.81,-795.58 ccw(c1896.71,-795.58) v1@1884.76,-807.53 ; 1879.81,-795.58 ccw(c1896.71,-795.58) v1@1884.76,-807.53 ; 1879.81,-795.58 ccw(c1896.71,-795.58) v1@1884.76,-807.53
  Top Layer w10: U31.6@1769.81,-892.48 C150.2@1879.81,-892.48 v1(1879.81,-812.48) ; U31.6@1802.76,-897.43 cw(c1814.71,-909.38) 1814.71,-892.48 ; U31.6@1802.76,-897.43 cw(c1814.71,-909.38) 1814.71,-892.48 ; U31.6@1802.76,-897.43 cw(c1814.71,-909.38) 1814.71,-892.48 ; U31.6@1802.76,-887.53 ccw(c1814.71,-875.58) 1814.71,-892.48 ; U31.6@1802.76,-887.53 ccw(c1814.71,-875.58) 1814.71,-892.48 ; U31.6@1802.76,-887.53 ccw(c1814.71,-875.58) 1814.71,-892.48 ; 1855.67,-892.48 cw(c1855.67,-916.62) C150.2@1872.74,-899.55 ; 1855.67,-892.48 ccw(c1855.67,-868.34) C150.2@1872.74,-885.41 ; 1855.67,-892.48 cw(c1855.67,-916.62) C150.2@1872.74,-899.55 ; 1855.67,-892.48 ccw(c1855.67,-868.34) C150.2@1872.74,-885.41 ; 1855.67,-892.48 ccw(c1855.67,-868.34) C150.2@1872.74,-885.41 ; 1855.67,-892.48 cw(c1855.67,-916.62) C150.2@1872.74,-899.55 ; C150.2@1872.74,-885.41 ccw(c1855.67,-868.34) 1879.81,-868.34 ; C150.2@1872.74,-885.41 ccw(c1855.67,-868.34) 1879.81,-868.34 ; C150.2@1872.74,-885.41 ccw(c1855.67,-868.34) 1879.81,-868.34 ; v1@1875.92,-816.37 cw(c1866.53,-825.76) 1879.81,-825.76 ; v1@1875.92,-816.37 cw(c1866.53,-825.76) 1879.81,-825.76 ; v1@1875.92,-816.37 cw(c1866.53,-825.76) 1879.81,-825.76 ; 1879.81,-868.34 ccw(c1903.95,-868.34) C150.2@1886.88,-885.41 ; 1879.81,-868.34 ccw(c1903.95,-868.34) C150.2@1886.88,-885.41 ; 1879.81,-868.34 ccw(c1903.95,-868.34) C150.2@1886.88,-885.41 ; 1879.81,-825.76 cw(c1893.09,-825.76) v1@1883.7,-816.37 ; 1879.81,-825.76 cw(c1893.09,-825.76) v1@1883.7,-816.37 ; 1879.81,-825.76 cw(c1893.09,-825.76) v1@1883.7,-816.37
  Bottom Layer w10: C149.1@1779.81,-812.48 v1(1879.81,-812.48) ; 1842.58,-812.48 cw(c1842.58,-753.65) 1800.98,-795.25 ccw(c1842.58,-753.65) 1842.58,-812.48 ; 1842.58,-812.48 ccw(c1842.58,-871.31) 1800.98,-829.71 cw(c1842.58,-871.31) 1842.58,-812.48 ; 1866.53,-812.48 cw(c1866.53,-825.76) v1@1875.92,-816.37 ; 1866.53,-812.48 ccw(c1866.53,-799.2) v1@1875.92,-808.59 ; 1866.53,-812.48 cw(c1866.53,-825.76) v1@1875.92,-816.37 ; 1866.53,-812.48 ccw(c1866.53,-799.2) v1@1875.92,-808.59 ; 1866.53,-812.48 ccw(c1866.53,-799.2) v1@1875.92,-808.59 ; 1866.53,-812.48 cw(c1866.53,-825.76) v1@1875.92,-816.37 ; 1866.72,-812.48 cw(c1866.72,-729.5) 1808.05,-788.18 ccw(c1866.72,-729.5) 1866.72,-812.48 ; 1866.72,-812.48 ccw(c1866.72,-895.46) 1808.05,-836.78 cw(c1866.72,-895.46) 1866.72,-812.48
NetC155_2: C155.2 C156.1 U30.1 U32.6 | length 1497.8
  Top Layer w10: U30.1@-1080.19,1032.52 C155.2@-1220.19,1032.52 -1255.19,1032.52 -1275.19,1012.52 -1275.19,917.52 -1240.19,882.52 -850.19,882.52 -820.19,852.52 v1(-820.19,742.52) U32.6@-910.19,742.52 ; -1244.33,1032.52 cw(c-1244.33,1008.38) C155.2@-1227.26,1025.45 ; -1244.33,1032.52 ccw(c-1244.33,1056.66) C155.2@-1227.26,1039.59 ; -1244.33,1032.52 cw(c-1244.33,1008.38) C155.2@-1227.26,1025.45 ; -1244.33,1032.52 ccw(c-1244.33,1056.66) C155.2@-1227.26,1039.59 ; -1244.33,1032.52 ccw(c-1244.33,1056.66) C155.2@-1227.26,1039.59 ; -1244.33,1032.52 cw(c-1244.33,1008.38) C155.2@-1227.26,1025.45 ; C155.2@-1213.12,1025.45 cw(c-1196.05,1008.38) -1196.05,1032.52 ; C155.2@-1213.12,1025.45 cw(c-1196.05,1008.38) -1196.05,1032.52 ; C155.2@-1213.12,1025.45 cw(c-1196.05,1008.38) -1196.05,1032.52 ; C155.2@-1213.12,1039.59 ccw(c-1196.05,1056.66) -1196.05,1032.52 ; C155.2@-1213.12,1039.59 ccw(c-1196.05,1056.66) -1196.05,1032.52 ; C155.2@-1213.12,1039.59 ccw(c-1196.05,1056.66) -1196.05,1032.52 ; -1118.3,1032.52 cw(c-1118.3,1014.41) U30.1@-1105.49,1027.22 ; -1118.3,1032.52 ccw(c-1118.3,1050.63) U30.1@-1105.49,1037.82 ; -1118.3,1032.52 cw(c-1118.3,1014.41) U30.1@-1105.49,1027.22 ; -1118.3,1032.52 ccw(c-1118.3,1050.63) U30.1@-1105.49,1037.82 ; -1118.3,1032.52 ccw(c-1118.3,1050.63) U30.1@-1105.49,1037.82 ; -1118.3,1032.52 cw(c-1118.3,1014.41) U30.1@-1105.49,1027.22 ; U32.6@-877.24,737.57 cw(c-865.29,725.62) -865.29,742.52 ; U32.6@-877.24,737.57 cw(c-865.29,725.62) -865.29,742.52 ; U32.6@-877.24,737.57 cw(c-865.29,725.62) -865.29,742.52 ; U32.6@-877.24,747.47 ccw(c-865.29,759.42) -865.29,742.52 ; U32.6@-877.24,747.47 ccw(c-865.29,759.42) -865.29,742.52 ; U32.6@-877.24,747.47 ccw(c-865.29,759.42) -865.29,742.52 ; -833.47,742.52 cw(c-833.47,729.24) v1@-824.08,738.63 ; -833.47,742.52 ccw(c-833.47,755.8) v1@-824.08,746.41 ; -833.47,742.52 cw(c-833.47,729.24) v1@-824.08,738.63 ; -833.47,742.52 ccw(c-833.47,755.8) v1@-824.08,746.41 ; -833.47,742.52 ccw(c-833.47,755.8) v1@-824.08,746.41 ; -833.47,742.52 cw(c-833.47,729.24) v1@-824.08,738.63 ; v1@-824.08,746.41 ccw(c-833.47,755.8) -820.19,755.8 ; v1@-824.08,746.41 ccw(c-833.47,755.8) -820.19,755.8 ; v1@-824.08,746.41 ccw(c-833.47,755.8) -820.19,755.8 ; -820.19,755.8 ccw(c-806.91,755.8) v1@-816.3,746.41 ; -820.19,755.8 ccw(c-806.91,755.8) v1@-816.3,746.41 ; -820.19,755.8 ccw(c-806.91,755.8) v1@-816.3,746.41
NetC159_1: C159.1 U33.1 | length 301.5
  Top Layer w10: U33.1@4280.56,-852.91 4327.38,-852.91 4338.2,-842.09 ; v1@4345.55,-845.57 ccw(c4338.2,-851.58) 4338.2,-842.09 ; v1@4345.55,-838.6 cw(c4338.2,-832.59) 4338.2,-842.09 ; v1(4349.81,-842.09) 4338.2,-842.09
  Bottom Layer w10: C159.1@4314.81,-842.48 v1@4349.42,-842.48 ; C159.1@4321.88,-849.55 cw(c4338.95,-866.62) 4338.95,-842.48 ; C159.1@4321.88,-849.55 cw(c4338.95,-866.62) 4338.95,-842.48 ; C159.1@4321.88,-849.55 cw(c4338.95,-866.62) 4338.95,-842.48 ; C159.1@4321.88,-835.41 ccw(c4338.95,-818.34) 4338.95,-842.48 ; C159.1@4321.88,-835.41 ccw(c4338.95,-818.34) 4338.95,-842.48 ; C159.1@4321.88,-835.41 ccw(c4338.95,-818.34) 4338.95,-842.48 ; 4335.58,-842.48 ccw(c4335.58,-827.86) v1@4345.92,-838.2 ; 4335.58,-842.48 ccw(c4335.58,-827.86) v1@4345.92,-838.2 ; 4335.58,-842.48 ccw(c4335.58,-827.86) v1@4345.92,-838.2 ; 4337.48,-842.48 cw(c4337.48,-854.41) v1@4345.92,-845.98 ; 4337.48,-842.48 cw(c4337.48,-854.41) v1@4345.92,-845.98 ; 4337.48,-842.48 cw(c4337.48,-854.41) v1@4345.92,-845.98
NetC159_2: C159.2 U33.3 | length 423.3
  Top Layer w10: U33.3@4280.56,-904.09 4353.2,-904.09 v1(4354.81,-902.48) ; 4337.63,-904.09 ccw(c4337.63,-885.31) v1@4350.92,-898.59 ; 4337.63,-904.09 ccw(c4337.63,-885.31) v1@4350.92,-898.59 ; 4337.63,-904.09 ccw(c4337.63,-885.31) v1@4350.92,-898.59
  Bottom Layer w10: C159.2@4314.81,-897.48 4349.81,-897.48 v1(4354.81,-902.48) ; C159.2@4321.88,-904.55 cw(c4338.95,-921.62) 4338.95,-897.48 ; C159.2@4321.88,-904.55 cw(c4338.95,-921.62) 4338.95,-897.48 ; C159.2@4321.88,-904.55 cw(c4338.95,-921.62) 4338.95,-897.48 ; C159.2@4321.88,-890.41 ccw(c4338.95,-873.34) 4338.95,-897.48 ; C159.2@4321.88,-890.41 ccw(c4338.95,-873.34) 4338.95,-897.48 ; C159.2@4321.88,-890.41 ccw(c4338.95,-873.34) 4338.95,-897.48 ; C159.2@4329.46,-897.48 cw(c4329.46,-927.83) v1@4350.92,-906.37 ; C159.2@4329.46,-897.48 cw(c4329.46,-927.83) v1@4350.92,-906.37 ; C159.2@4329.46,-897.48 cw(c4329.46,-927.83) v1@4350.92,-906.37 ; C159.2@4322.03,-904.39 cw(c4334,-915.85) 4338.29,-899.85 ccw(c4334,-915.85) C159.2@4322.03,-904.39 ; C159.2@4323.47,-892.48 ccw(c4333.17,-886.88) 4330.27,-897.7 cw(c4333.17,-886.88) C159.2@4323.47,-892.48 ; 4339.97,-900.05 ccw(c4344.5,-892.21) 4350.91,-898.6 cw(c4344.5,-892.21) 4339.97,-900.05
NetC161_1: C161.1 U33.4 | length 320.9
  Top Layer w10: U33.4@4280.56,-929.69 4337.01,-929.69 v1(4354.81,-947.48) ; v1@4349.31,-947.48 ccw(c4336.03,-947.48) 4345.42,-938.09 ccw(c4354.81,-928.7) v1@4354.81,-941.98
  Bottom Layer w10: C161.1@4309.81,-957.48 4344.81,-957.48 v1(4354.81,-947.48) ; C161.1@4317.39,-957.48 ccw(c4317.39,-910.06) v1@4350.92,-943.59 ; 4341.53,-957.48 ccw(c4341.53,-934.2) v1@4357.99,-950.66 ; C161.1@4316.88,-964.55 cw(c4333.95,-981.62) 4333.95,-957.48 ; C161.1@4316.88,-964.55 cw(c4333.95,-981.62) 4333.95,-957.48 ; C161.1@4316.88,-964.55 cw(c4333.95,-981.62) 4333.95,-957.48 ; C161.1@4316.88,-950.41 ccw(c4333.95,-933.34) 4333.95,-957.48 ; C161.1@4316.88,-950.41 ccw(c4333.95,-933.34) 4333.95,-957.48 ; C161.1@4316.88,-950.41 ccw(c4333.95,-933.34) 4333.95,-957.48
NetC161_2: C161.2 U33.5 | length 355.6
  Top Layer w10: v1(4209.81,-955.28) U33.5@4280.56,-955.28 ; v1@4213.7,-959.16 cw(c4223.09,-968.55) 4223.09,-955.28 ; v1@4213.7,-959.16 cw(c4223.09,-968.55) 4223.09,-955.28 ; v1@4213.7,-959.16 cw(c4223.09,-968.55) 4223.09,-955.28 ; v1@4213.7,-951.39 ccw(c4223.09,-942) 4223.09,-955.28 ; v1@4213.7,-951.39 ccw(c4223.09,-942) 4223.09,-955.28 ; v1@4213.7,-951.39 ccw(c4223.09,-942) 4223.09,-955.28
  Bottom Layer w10: v1(4209.81,-955.28) 4252.6,-955.28 C161.2@4254.81,-957.48 ; v1@4213.7,-959.16 cw(c4223.09,-968.55) 4223.09,-955.28 ; v1@4213.7,-959.16 cw(c4223.09,-968.55) 4223.09,-955.28 ; v1@4213.7,-959.16 cw(c4223.09,-968.55) 4223.09,-955.28 ; v1@4213.7,-951.39 ccw(c4223.09,-942) 4223.09,-955.28 ; v1@4213.7,-951.39 ccw(c4223.09,-942) 4223.09,-955.28 ; v1@4213.7,-951.39 ccw(c4223.09,-942) 4223.09,-955.28 ; 4225.34,-955.28 cw(c4225.34,-986.95) C161.2@4247.74,-964.55 ; 4225.34,-955.28 cw(c4225.34,-986.95) C161.2@4247.74,-964.55 ; 4225.34,-955.28 cw(c4225.34,-986.95) C161.2@4247.74,-964.55 ; 4235.99,-955.28 ccw(c4235.99,-938.66) C161.2@4247.74,-950.41 ; 4235.99,-955.28 ccw(c4235.99,-938.66) C161.2@4247.74,-950.41 ; 4235.99,-955.28 ccw(c4235.99,-938.66) C161.2@4247.74,-950.41
NetC162_1: C162.1 U33.2 | length 312.4
  Top Layer w10: v1(4209.81,-887.48) 4218.79,-878.5 ; v1@4209.99,-881.98 ccw(c4210.37,-870.09) 4218.79,-878.5 ; v1@4215.31,-887.3 cw(c4227.2,-886.92) 4218.79,-878.5 ; U33.2@4280.56,-878.5 4218.79,-878.5
  Bottom Layer w10: v1@4206.63,-890.66 ccw(c4223.09,-874.2) 4223.09,-897.48 ; v1(4209.81,-887.48) 4219.81,-897.48 C162.1@4254.81,-897.48 ; v1@4213.7,-883.59 ccw(c4247.23,-850.06) C162.1@4247.23,-897.48 ; 4230.67,-897.48 cw(c4230.67,-921.62) C162.1@4247.74,-904.55 ; 4230.67,-897.48 ccw(c4230.67,-873.34) C162.1@4247.74,-890.41 ; 4230.67,-897.48 cw(c4230.67,-921.62) C162.1@4247.74,-904.55 ; 4230.67,-897.48 ccw(c4230.67,-873.34) C162.1@4247.74,-890.41 ; 4230.67,-897.48 ccw(c4230.67,-873.34) C162.1@4247.74,-890.41 ; 4230.67,-897.48 cw(c4230.67,-921.62) C162.1@4247.74,-904.55
NetC163_1: C163.1 U33.6 | length 343.3
  Top Layer w10: U33.6@4280.56,-980.87 4338.2,-980.87 4354.81,-997.48 v1(4354.81,-1017.48) ; v1@4350.92,-1013.59 ccw(c4341.53,-1004.2) 4354.81,-1004.2 ccw(c4368.09,-1004.2) v1@4358.7,-1013.59
  Bottom Layer w10: C163.1@4309.81,-1017.48 v1(4354.81,-1017.48) ; C163.1@4316.88,-1024.55 cw(c4333.95,-1041.62) 4333.95,-1017.48 ; C163.1@4316.88,-1024.55 cw(c4333.95,-1041.62) 4333.95,-1017.48 ; C163.1@4316.88,-1024.55 cw(c4333.95,-1041.62) 4333.95,-1017.48 ; C163.1@4316.88,-1010.41 ccw(c4333.95,-993.34) 4333.95,-1017.48 ; C163.1@4316.88,-1010.41 ccw(c4333.95,-993.34) 4333.95,-1017.48 ; C163.1@4316.88,-1010.41 ccw(c4333.95,-993.34) 4333.95,-1017.48 ; 4341.53,-1017.48 cw(c4341.53,-1030.76) v1@4350.92,-1021.37 ; 4341.53,-1017.48 ccw(c4341.53,-1004.2) v1@4350.92,-1013.59 ; 4341.53,-1017.48 cw(c4341.53,-1030.76) v1@4350.92,-1021.37 ; 4341.53,-1017.48 ccw(c4341.53,-1004.2) v1@4350.92,-1013.59 ; 4341.53,-1017.48 ccw(c4341.53,-1004.2) v1@4350.92,-1013.59 ; 4341.53,-1017.48 cw(c4341.53,-1030.76) v1@4350.92,-1021.37
NetC181_1: C181.1 U34.5 XTAL1.1 | length 657.6
  Top Layer w7: U34.5@1879.31,1454.62 2031.71,1454.62 XTAL1.1@2137.81,1348.52
  Bottom Layer w7: XTAL1.1@2137.81,1348.52 2192.86,1403.57 ; XTAL1.1@2137.81,1362.02 ccw(c2137.81,1394.61) 2160.86,1371.57 ccw(c2183.9,1348.52) XTAL1.1@2151.31,1348.52 ; XTAL1.1@2137.81,1369.02 ccw(c2137.81,1418.51) 2172.81,1383.52 ccw(c2207.8,1348.52) XTAL1.1@2158.31,1348.52 ; XTAL1.1@2137.81,1376.02 ccw(c2137.81,1442.41) 2184.76,1395.47 ccw(c2231.7,1348.52) XTAL1.1@2165.31,1348.52 ; C181.1@2202.86,1397.81 ccw(c2192.87,1392.03) 2192.87,1403.57 ; C181.1@2202.86,1409.34 cw(c2192.87,1415.12) 2192.87,1403.57 ; C181.1@2212.81,1403.57 2192.86,1403.57
NetC182_1: C182.1 U34.6 XTAL1.2 | length 492.4
  Top Layer w7: U34.6@1879.31,1474.31 2063.6,1474.31 XTAL1.2@2137.81,1548.52
  Bottom Layer w7: XTAL1.2@2127.57,1523 cw(c2121.5,1507.86) 2137.81,1507.86 ; XTAL1.2@2137.81,1548.52 2137.81,1507.86 ; XTAL1.2@2148.05,1523 ccw(c2154.12,1507.86) 2137.81,1507.86 ; C182.1@2203.69,1475.33 ccw(c2184.06,1455.7) 2184.06,1483.46 ccw(c2184.06,1511.23) C182.1@2203.69,1491.6 ; C182.1@2207.81,1483.46 2162.21,1483.46 2137.81,1507.86
NetC183_2: C183.2 U34.7 | length 257.8
  Top Layer w7: U34.7@1879.31,1493.99 1947.62,1493.99 v2(1959.15,1505.52) ; v2@1952.65,1505.52 cw(c1936.96,1505.52) 1948.05,1494.42 cw(c1959.15,1483.33) v2@1959.15,1499.02
  Bottom Layer w7: C183.2@1875.81,1508.52 1956.15,1508.52 v2(1959.15,1505.52) ; C183.2@1883.94,1500.39 cw(c1903.57,1480.76) 1903.57,1508.52 cw(c1903.57,1536.28) C183.2@1883.94,1516.65 ; 1936.21,1508.52 cw(c1936.21,1482.58) v2@1954.55,1500.92
NetC184_2: C184.2 U34.3 XTAL2.1 | length 563.5
  Top Layer w7: U34.3@1879.31,1415.25 1938.15,1415.25 1957.81,1395.59 XTAL2.1@1957.81,1167.52
  Bottom Layer w7: C184.2@1944.68,1089.65 ccw(c1912.98,1121.35) 1957.81,1121.35 ; XTAL2.1@1946.37,1156.08 cw(c1918.74,1128.45) 1957.81,1128.45 cw(c1996.88,1128.45) XTAL2.1@1969.25,1156.08 ; C184.2@1949.63,1084.7 ccw(c1929.87,1104.45) 1957.81,1104.45 ; XTAL2.1@1951.31,1161.02 cw(c1935.63,1145.35) 1957.81,1145.35 cw(c1979.98,1145.35) XTAL2.1@1964.3,1161.02 ; C184.2@1952.81,1081.52 1957.81,1086.52 XTAL2.1@1957.81,1166.52 ; 1957.81,1097.21 ccw(c1968.5,1097.21) C184.2@1960.94,1089.65
NetC185_2: C185.2 U34.4 XTAL2.2 | length 608.4
  Top Layer w7: U34.4@1879.31,1434.94 1980.73,1434.94 2016.86,1398.8 XTAL2.2@2016.86,1167.52 ; XTAL2.2@2016.36,1167.02 XTAL2.2@2016.86,1166.52
  Bottom Layer w7: XTAL2.2@2005.42,1156.08 cw(c1975.51,1126.16) 2017.81,1126.16 ; C185.2@2009.68,1089.65 ccw(c1990.05,1109.28) 2017.81,1109.28 ccw(c2045.57,1109.28) C185.2@2025.94,1089.65 ; XTAL2.2@2010.37,1161.02 cw(c1992.41,1143.06) 2017.81,1143.06 ; C185.2@2017.81,1081.52 XTAL2.2@2017.81,1165.57 ; 2017.81,1130.73 cw(c2053.66,1130.73) XTAL2.2@2028.31,1156.08 ; 2017.81,1147.63 cw(c2036.76,1147.63) XTAL2.2@2023.36,1161.02
NetC202_1: C202.1 L5.1 U40.3 | length 310.2
  Bottom Layer w30: L5.1@4744.93,-17.48 4834.81,-17.48 ; L5.1@4756.59,-29.14 cw(c4784.75,-57.3) 4784.75,-17.48 cw(c4784.75,22.34) L5.1@4756.59,-5.82 ; 4834.81,-23.96 cw(c4872.93,-23.96) U40.3@4863.52,12.98 ; C202.1@4839.81,-67.48 4839.81,-22.48 4834.81,-17.48 ; U40.3@4859.81,27.52 4834.81,2.52 4834.81,-17.48
NetD1_A: D1.A R104.2 | length 426.3
  Top Layer w10: R104.2@4104.81,2292.52 D1.A@4189.81,2292.52 ; R104.2@4111.88,2285.45 cw(c4128.95,2268.38) 4128.95,2292.52 ; R104.2@4111.88,2285.45 cw(c4128.95,2268.38) 4128.95,2292.52 ; R104.2@4111.88,2285.45 cw(c4128.95,2268.38) 4128.95,2292.52 ; R104.2@4111.88,2299.59 ccw(c4128.95,2316.66) 4128.95,2292.52 ; R104.2@4111.88,2299.59 ccw(c4128.95,2316.66) 4128.95,2292.52 ; R104.2@4111.88,2299.59 ccw(c4128.95,2316.66) 4128.95,2292.52 ; 4141.53,2292.52 cw(c4141.53,2244.24) D1.A@4175.67,2278.38 ; 4141.53,2292.52 ccw(c4141.53,2340.8) D1.A@4175.67,2306.66 ; 4141.53,2292.52 cw(c4141.53,2244.24) D1.A@4175.67,2278.38 ; 4141.53,2292.52 ccw(c4141.53,2340.8) D1.A@4175.67,2306.66 ; 4141.53,2292.52 ccw(c4141.53,2340.8) D1.A@4175.67,2306.66 ; 4141.53,2292.52 cw(c4141.53,2244.24) D1.A@4175.67,2278.38
NetD1_K: D1.K U36.J2-6 | length 1061.7
  Top Layer w10: U36.J2-6@4114.81,1392.52 4267.15,1392.52 4289.81,1415.18 D1.K@4289.81,2292.52
NetD2_A: D2.A R105.2 | length 426.3
  Top Layer w10: R105.2@4499.81,2292.52 D2.A@4584.81,2292.52 ; R105.2@4506.88,2285.45 cw(c4523.95,2268.38) 4523.95,2292.52 ; R105.2@4506.88,2285.45 cw(c4523.95,2268.38) 4523.95,2292.52 ; R105.2@4506.88,2285.45 cw(c4523.95,2268.38) 4523.95,2292.52 ; R105.2@4506.88,2299.59 ccw(c4523.95,2316.66) 4523.95,2292.52 ; R105.2@4506.88,2299.59 ccw(c4523.95,2316.66) 4523.95,2292.52 ; R105.2@4506.88,2299.59 ccw(c4523.95,2316.66) 4523.95,2292.52 ; 4536.53,2292.52 cw(c4536.53,2244.24) D2.A@4570.67,2278.38 ; 4536.53,2292.52 ccw(c4536.53,2340.8) D2.A@4570.67,2306.66 ; 4536.53,2292.52 cw(c4536.53,2244.24) D2.A@4570.67,2278.38 ; 4536.53,2292.52 ccw(c4536.53,2340.8) D2.A@4570.67,2306.66 ; 4536.53,2292.52 ccw(c4536.53,2340.8) D2.A@4570.67,2306.66 ; 4536.53,2292.52 cw(c4536.53,2244.24) D2.A@4570.67,2278.38
NetD3_A: D3.A R106.2 | length 426.3
  Top Layer w10: R106.2@4894.81,2292.52 D3.A@4979.81,2292.52 ; R106.2@4901.88,2285.45 cw(c4918.95,2268.38) 4918.95,2292.52 ; R106.2@4901.88,2285.45 cw(c4918.95,2268.38) 4918.95,2292.52 ; R106.2@4901.88,2285.45 cw(c4918.95,2268.38) 4918.95,2292.52 ; R106.2@4901.88,2299.59 ccw(c4918.95,2316.66) 4918.95,2292.52 ; R106.2@4901.88,2299.59 ccw(c4918.95,2316.66) 4918.95,2292.52 ; R106.2@4901.88,2299.59 ccw(c4918.95,2316.66) 4918.95,2292.52 ; 4931.53,2292.52 cw(c4931.53,2244.24) D3.A@4965.67,2278.38 ; 4931.53,2292.52 ccw(c4931.53,2340.8) D3.A@4965.67,2306.66 ; 4931.53,2292.52 cw(c4931.53,2244.24) D3.A@4965.67,2278.38 ; 4931.53,2292.52 ccw(c4931.53,2340.8) D3.A@4965.67,2306.66 ; 4931.53,2292.52 ccw(c4931.53,2340.8) D3.A@4965.67,2306.66 ; 4931.53,2292.52 cw(c4931.53,2244.24) D3.A@4965.67,2278.38
NetD3_K: D3.K U36.J2-9 | length 2084.4
  Top Layer w10: U36.J2-9@4114.81,1092.52 4942.15,1092.52 5079.81,1230.18 D3.K@5079.81,2292.52
NetD4_A: D4.A R135.2 | length 205.8
  Top Layer w7: D4.A@2585.15,1888.52 R135.2@2660.15,1888.52 ; 2632.39,1888.52 cw(c2632.39,1860.76) R135.2@2652.02,1880.39 ; 2632.39,1888.52 ccw(c2632.39,1916.28) R135.2@2652.02,1896.65 ; 2632.39,1888.52 cw(c2632.39,1860.76) R135.2@2652.02,1880.39 ; 2632.39,1888.52 ccw(c2632.39,1916.28) R135.2@2652.02,1896.65 ; 2632.39,1888.52 ccw(c2632.39,1916.28) R135.2@2652.02,1896.65 ; 2632.39,1888.52 cw(c2632.39,1860.76) R135.2@2652.02,1880.39
NetD5_A: D5.A R136.2 | length 205.8
  Top Layer w7: D5.A@2586.15,2008.52 R136.2@2661.15,2008.52 ; 2633.39,2008.52 cw(c2633.39,1980.76) R136.2@2653.02,2000.39 ; 2633.39,2008.52 ccw(c2633.39,2036.28) R136.2@2653.02,2016.65 ; 2633.39,2008.52 cw(c2633.39,1980.76) R136.2@2653.02,2000.39 ; 2633.39,2008.52 ccw(c2633.39,2036.28) R136.2@2653.02,2016.65 ; 2633.39,2008.52 ccw(c2633.39,2036.28) R136.2@2653.02,2016.65 ; 2633.39,2008.52 cw(c2633.39,1980.76) R136.2@2653.02,2000.39
NetD6_A: D6.A R137.2 | length 205.8
  Top Layer w7: D6.A@2585.15,2137.52 R137.2@2660.15,2137.52 ; 2632.39,2137.52 cw(c2632.39,2109.76) R137.2@2652.02,2129.39 ; 2632.39,2137.52 ccw(c2632.39,2165.28) R137.2@2652.02,2145.65 ; 2632.39,2137.52 cw(c2632.39,2109.76) R137.2@2652.02,2129.39 ; 2632.39,2137.52 ccw(c2632.39,2165.28) R137.2@2652.02,2145.65 ; 2632.39,2137.52 ccw(c2632.39,2165.28) R137.2@2652.02,2145.65 ; 2632.39,2137.52 cw(c2632.39,2109.76) R137.2@2652.02,2129.39
NetD7_A: D7.A R138.2 | length 540.6
  Top Layer w10: D7.A@6544.81,147.52 v1@6584.81,147.52 ; v1(6589.81,152.52) v1@6584.81,147.52 ; D7.A@6560.81,135.52 cw(c6584.81,117.52) v1@6584.81,147.52 ; D7.A@6560.81,135.52 cw(c6584.81,117.52) v1@6584.81,147.52 ; D7.A@6560.81,135.52 cw(c6584.81,117.52) v1@6584.81,147.52 ; D7.A@6560.81,159.52 ccw(c6584.81,177.52) v1@6584.81,147.52 ; D7.A@6560.81,159.52 ccw(c6584.81,177.52) v1@6584.81,147.52 ; D7.A@6560.81,159.52 ccw(c6584.81,177.52) v1@6584.81,147.52 ; D7.A@6564.46,147.52 ccw(c6564.46,177.87) v1@6585.92,156.41 ; D7.A@6564.46,147.52 ccw(c6564.46,177.87) v1@6585.92,156.41 ; D7.A@6564.46,147.52 ccw(c6564.46,177.87) v1@6585.92,156.41 ; 6574.97,150.09 cw(c6579.5,142.25) 6585.91,148.64 ccw(c6579.5,142.25) 6574.97,150.09
  Bottom Layer w10: R138.2@6534.81,152.52 v1(6589.81,152.52) ; R138.2@6541.88,145.45 cw(c6558.95,128.38) 6558.95,152.52 ; R138.2@6541.88,145.45 cw(c6558.95,128.38) 6558.95,152.52 ; R138.2@6541.88,145.45 cw(c6558.95,128.38) 6558.95,152.52 ; R138.2@6541.88,159.59 ccw(c6558.95,176.66) 6558.95,152.52 ; R138.2@6541.88,159.59 ccw(c6558.95,176.66) 6558.95,152.52 ; R138.2@6541.88,159.59 ccw(c6558.95,176.66) 6558.95,152.52 ; 6576.53,152.52 cw(c6576.53,139.24) v1@6585.92,148.63 ; 6576.53,152.52 ccw(c6576.53,165.8) v1@6585.92,156.41 ; 6576.53,152.52 cw(c6576.53,139.24) v1@6585.92,148.63 ; 6576.53,152.52 ccw(c6576.53,165.8) v1@6585.92,156.41 ; 6576.53,152.52 ccw(c6576.53,165.8) v1@6585.92,156.41 ; 6576.53,152.52 cw(c6576.53,139.24) v1@6585.92,148.63
NetP5_1: P5.1 P102.25 | length 4437.5
  Top Layer w7: P102.25@775.04,2081.9 cw(c764.21,2071.07) 779.53,2071.07 cw(c794.85,2071.07) P102.25@784.02,2081.9 ; v2(779.53,1525) P102.25@779.53,2115.91
  Bottom Layer w7: v2@774.93,1520.4 cw(c763.84,1509.31) 779.53,1509.31 cw(c795.22,1509.31) v2@784.13,1520.4 ; v2(779.53,1525) 779.53,793.68 889.1,684.1 2265.9,684.1 2553,971.21 2553,1238 2565,1250 2605,1250 3315,1250 3325,1240 ; P5.1@3314.46,1223.8 ccw(c3307.28,1240) 3325,1240 ; P5.1@3325,1200 3325,1240 ; P5.1@3335.54,1223.8 cw(c3342.72,1240) 3325,1240
NetP5_2: P5.2 P102.27 | length 4350.8
  Top Layer w7: v2@806.43,1529.6 ccw(c795.34,1540.69) 811.03,1540.69 ccw(c826.72,1540.69) v2@815.63,1529.6 ; P102.27@806.54,2081.9 cw(c795.71,2071.07) 811.03,2071.07 cw(c826.35,2071.07) P102.27@815.52,2081.9 ; v2(811.03,1525) P102.27@811.03,2115.91 ; P5.2@3225,1200 v2(3225,1290)
  Bottom Layer w7: v2@806.43,1520.4 cw(c795.34,1509.31) 811.03,1509.31 cw(c826.72,1509.31) v2@815.63,1520.4 ; v2(811.03,1525) 811.03,806.73 911.38,706.38 2243.62,706.38 2521.5,984.26 2521.5,1251.05 2560.45,1290 v2(3225,1290) ; v2@3220.4,1285.4 ccw(c3209.31,1274.31) 3209.31,1290 ccw(c3209.31,1305.69) v2@3220.4,1294.6
NetP5_3: P5.3 P102.29 | length 4235.6
  Top Layer w7: v2@837.92,1529.6 ccw(c826.83,1540.69) 842.52,1540.69 ccw(c858.21,1540.69) v2@847.12,1529.6 ; P102.29@838.03,2081.9 cw(c827.2,2071.07) 842.52,2071.07 cw(c857.84,2071.07) P102.29@847.01,2081.9 ; v2(842.52,1525) P102.29@842.52,2115.91 ; P5.3@3125,1200 v2(3125,1320)
  Bottom Layer w7: v2@837.92,1520.4 cw(c826.83,1509.31) 842.52,1509.31 cw(c858.21,1509.31) v2@847.12,1520.4 ; v2(842.52,1525) 842.52,819.77 933.64,728.64 2221.36,728.64 2490.01,997.3 2490.01,1264.09 2545.92,1320 v2(3125,1320) ; v2@3120.4,1315.4 ccw(c3109.31,1304.31) 3109.31,1320 ccw(c3109.31,1335.69) v2@3120.4,1324.6
NetP5_4: P5.4 P102.31 | length 4120.4
  Top Layer w7: v2@869.42,1529.6 ccw(c858.33,1540.69) 874.02,1540.69 ccw(c889.71,1540.69) v2@878.62,1529.6 ; P102.31@869.53,2081.9 cw(c858.7,2071.07) 874.02,2071.07 cw(c889.34,2071.07) P102.31@878.51,2081.9 ; v2(874.02,1525) P102.31@874.02,2115.91 ; P5.4@3025,1200 v2(3025,1350)
  Bottom Layer w7: v2@869.42,1520.4 cw(c858.33,1509.31) 874.02,1509.31 cw(c889.71,1509.31) v2@878.62,1520.4 ; v2(874.02,1525) 874.02,832.82 955.92,750.92 2199.08,750.92 2458.51,1010.35 2458.51,1277.14 2531.37,1350 v2(3025,1350) ; v2@3020.4,1345.4 ccw(c3009.31,1334.31) 3009.31,1350 ccw(c3009.31,1365.69) v2@3020.4,1354.6
NetP5_5: P5.5 P102.33 | length 4005.3
  Top Layer w7: v2@900.91,1529.6 ccw(c889.82,1540.69) 905.51,1540.69 ccw(c921.2,1540.69) v2@910.11,1529.6 ; P102.33@901.02,2081.9 cw(c890.19,2071.07) 905.51,2071.07 cw(c920.83,2071.07) P102.33@910,2081.9 ; v2(905.51,1525) P102.33@905.51,2115.91 ; P5.5@2925,1200 v2(2925,1380)
  Bottom Layer w7: v2@900.91,1520.4 cw(c889.82,1509.31) 905.51,1509.31 cw(c921.2,1509.31) v2@910.11,1520.4 ; v2(905.51,1525) 905.51,845.86 978.19,773.19 2176.81,773.19 2427.02,1023.39 2427.02,1290.18 2516.84,1380 v2(2925,1380) ; v2@2920.4,1375.4 ccw(c2909.31,1364.31) 2909.31,1380 ccw(c2909.31,1395.69) v2@2920.4,1384.6
NetP5_6: P5.6 P102.35 | length 3883
  Top Layer w7: v2@932.41,1529.6 ccw(c921.32,1540.69) 937.01,1540.69 ccw(c952.7,1540.69) v2@941.61,1529.6 ; P102.35@932.52,2081.9 cw(c921.69,2071.07) 937.01,2071.07 cw(c952.33,2071.07) P102.35@941.5,2081.9 ; v2(937.01,1525) P102.35@937.01,2115.91 ; P5.6@2825,1200 v2(2825,1405)
  Bottom Layer w7: v2@932.41,1520.4 cw(c921.32,1509.31) 937.01,1509.31 cw(c952.7,1509.31) v2@941.61,1520.4 ; v2(937.01,1525) 937.01,858.91 1000.46,795.46 2154.54,795.46 2395.52,1036.44 2395.52,1303.23 2497.29,1405 v2(2825,1405) ; v2@2820.4,1400.4 ccw(c2809.31,1389.31) 2809.31,1405 ccw(c2809.31,1420.69) v2@2820.4,1409.6